# EAGLE board RAM_V2 (EAGLE 9.6.2)

Size 138.43 x 78.74 mm. Coordinates in mm from the lower left corner, seen from the top.
Outline: 133.35,0 138.43,5.08 138.43,73.66 133.35,78.74 5.08,78.74 0,73.66 0,5.08 5.08,0 133.35,0
Copper layers (1*16): Top 0.035mm / dielectric 1.5mm / Bottom 0.035mm
Design rules "default *": minimum track width 12mil, minimum drill 0.35mm, track to track 6mil, track to pad 6mil, pad to pad 6mil, via to via 6mil, smd to smd 6mil, copper to edge 40mil, drill to drill 6mil, minimum pad ring 10mil, minimum via ring 8mil, stop-mask expansion 4mil, vias tented up to drill 0mil, thermal gap 10mil

## Footprints (pad centres in the part's own frame; a part is rotated, then mirrored left to right if it is on the bottom)
LEDC1608X45N = smd 0.81 x 0.93: A 0.81,0; C -0.81,0
DIL14 = drill 0.813 long: 1 -7.62,-3.81; 2 -5.08,-3.81; 3 -2.54,-3.81; 4 0,-3.81; 5 2.54,-3.81; 6 5.08,-3.81; 7 7.62,-3.81; 8 7.62,3.81; 9 5.08,3.81; 10 2.54,3.81; 11 0,3.81; 12 -2.54,3.81; 13 -5.08,3.81; 14 -7.62,3.81
DIL20 = drill 0.813 long: 1 -11.43,-3.81; 2 -8.89,-3.81; 3 -6.35,-3.81; 4 -3.81,-3.81; 5 -1.27,-3.81; 6 1.27,-3.81; 7 3.81,-3.81; 8 6.35,-3.81; 9 8.89,-3.81; 10 11.43,-3.81; 11 11.43,3.81; 12 8.89,3.81; 13 6.35,3.81; 14 3.81,3.81; 15 1.27,3.81; 16 -1.27,3.81; 17 -3.81,3.81; 18 -6.35,3.81; 19 -8.89,3.81; 20 -11.43,3.81
R0805 = smd 1.3 x 1.5: 1 -0.95,0; 2 0.95,0
MA18-2 = drill 1.016 octagon: 1 -21.59,-1.27; 2 -21.59,1.27; 3 -19.05,-1.27; 4 -19.05,1.27; 5 -16.51,-1.27; 6 -16.51,1.27; 7 -13.97,-1.27; 8 -13.97,1.27; 9 -11.43,-1.27; 10 -11.43,1.27; 11 -8.89,-1.27; 12 -8.89,1.27; 13 -6.35,-1.27; 14 -6.35,1.27; 15 -3.81,-1.27; 16 -3.81,1.27; 17 -1.27,-1.27; 18 -1.27,1.27; 19 1.27,-1.27; 20 1.27,1.27; 21 3.81,-1.27; 22 3.81,1.27; 23 6.35,-1.27; 24 6.35,1.27; 25 8.89,-1.27; 26 8.89,1.27; 27 11.43,-1.27; 28 11.43,1.27; 29 13.97,-1.27; 30 13.97,1.27; 31 16.51,-1.27; 32 16.51,1.27; 33 19.05,-1.27; 34 19.05,1.27; 35 21.59,-1.27; 36 21.59,1.27
AS6C62256 = drill 0.813 long: !CE 7.62,-3.81; !OE 7.62,1.27; !WE 7.62,13.97; A0 -7.62,-6.35; A1 -7.62,-3.81; A2 -7.62,-1.27; A3 -7.62,1.27; A4 -7.62,3.81; A5 -7.62,6.35; A6 -7.62,8.89; A7 -7.62,11.43; A8 7.62,8.89; A9 7.62,6.35; A10 7.62,-1.27; A11 7.62,3.81; A12 -7.62,13.97; A13 7.62,11.43; A14 -7.62,16.51; GND -7.62,-16.51; I/O0 -7.62,-8.89; I/O1 -7.62,-11.43; I/O2 -7.62,-13.97; I/O3 7.62,-16.51; I/O4 7.62,-13.97; I/O5 7.62,-11.43; I/O6 7.62,-8.89; I/O7 7.62,-6.35; VCC 7.62,16.51

## Placement (x,y rotation side)
D1  LTST-C193KRKT-5A  [LEDC1608X45N]  -55.88,-12.7 0 top  (outside the outline)
D2  LTST-C193KRKT-5A  [LEDC1608X45N]  -55.88,-17.78 0 top  (outside the outline)
D3  LTST-C193KRKT-5A  [LEDC1608X45N]  -55.88,-22.86 0 top  (outside the outline)
D4  LTST-C193KRKT-5A  [LEDC1608X45N]  -55.88,-27.94 0 top  (outside the outline)
D5  LTST-C193KRKT-5A  [LEDC1608X45N]  -55.88,-33.02 0 top  (outside the outline)
D6  LTST-C193KRKT-5A  [LEDC1608X45N]  -55.88,-38.1 0 top  (outside the outline)
D7  LTST-C193KRKT-5A  [LEDC1608X45N]  -55.88,-43.18 0 top  (outside the outline)
D8  LTST-C193KRKT-5A  [LEDC1608X45N]  -55.88,-48.26 0 top  (outside the outline)
D9  LTST-C193KRKT-5A  [LEDC1608X45N]  -55.88,-53.34 0 top  (outside the outline)
D10  LTST-C193KRKT-5A  [LEDC1608X45N]  -55.88,-58.42 0 top  (outside the outline)
D11  LTST-C193KRKT-5A  [LEDC1608X45N]  -55.88,-63.5 0 top  (outside the outline)
D12  LTST-C193KRKT-5A  [LEDC1608X45N]  -55.88,-68.58 0 top  (outside the outline)
D13  LTST-C193KRKT-5A  [LEDC1608X45N]  -55.88,-73.66 0 top  (outside the outline)
D14  LTST-C193KRKT-5A  [LEDC1608X45N]  -55.88,-78.74 0 top  (outside the outline)
D15  LTST-C193KRKT-5A  [LEDC1608X45N]  -55.88,-83.82 0 top  (outside the outline)
D16  LTST-C193KRKT-5A  [LEDC1608X45N]  -55.88,-88.9 0 top  (outside the outline)
D17  LTST-C193KRKT-5A  [LEDC1608X45N]  -55.88,-93.98 0 top  (outside the outline)
D18  LTST-C193KRKT-5A  [LEDC1608X45N]  -55.88,-99.06 0 top  (outside the outline)
D19  LTST-C193KRKT-5A  [LEDC1608X45N]  -55.88,-104.14 0 top  (outside the outline)
D20  LTST-C193KRKT-5A  [LEDC1608X45N]  -55.88,-109.22 0 top  (outside the outline)
D21  LTST-C193KRKT-5A  [LEDC1608X45N]  -55.88,-114.3 0 top  (outside the outline)
D22  LTST-C193KRKT-5A  [LEDC1608X45N]  -55.88,-119.38 0 top  (outside the outline)
D23  LTST-C193KRKT-5A  [LEDC1608X45N]  -55.88,-124.46 0 top  (outside the outline)
D24  LTST-C193KRKT-5A  [LEDC1608X45N]  -55.88,-129.54 0 top  (outside the outline)
IC1  74HCT04N  [DIL14]  -46.99,-299.72 0 top  (outside the outline)
IC2  74HCT32N  [DIL14]  -46.99,-311.15 0 top  (outside the outline)
IC3  74HCT08N  [DIL14]  -46.99,-322.58 0 top  (outside the outline)
IC4  74HCT245N  [DIL20]  -43.18,-334.01 0 top  (outside the outline)
IC5  74HCT32N  [DIL14]  -46.99,-345.44 0 top  (outside the outline)
R1  [R0805]  -55.88,-135.89 0 top  (outside the outline)
R2  [R0805]  -55.88,-140.97 0 top  (outside the outline)
R3  [R0805]  -55.88,-146.05 0 top  (outside the outline)
R4  [R0805]  -55.88,-151.13 0 top  (outside the outline)
R5  [R0805]  -55.88,-156.21 0 top  (outside the outline)
R6  [R0805]  -55.88,-161.29 0 top  (outside the outline)
R7  [R0805]  -55.88,-166.37 0 top  (outside the outline)
R8  [R0805]  -55.88,-171.45 0 top  (outside the outline)
R9  [R0805]  -55.88,-176.53 0 top  (outside the outline)
R10  [R0805]  -55.88,-181.61 0 top  (outside the outline)
R11  [R0805]  -55.88,-186.69 0 top  (outside the outline)
R12  [R0805]  -55.88,-191.77 0 top  (outside the outline)
R13  [R0805]  -55.88,-196.85 0 top  (outside the outline)
R14  [R0805]  -55.88,-201.93 0 top  (outside the outline)
R15  [R0805]  -55.88,-207.01 0 top  (outside the outline)
R16  [R0805]  -55.88,-212.09 0 top  (outside the outline)
R17  [R0805]  -55.88,-217.17 0 top  (outside the outline)
R18  [R0805]  -55.88,-222.25 0 top  (outside the outline)
R19  [R0805]  -55.88,-227.33 0 top  (outside the outline)
R20  [R0805]  -55.88,-232.41 0 top  (outside the outline)
R21  [R0805]  -55.88,-237.49 0 top  (outside the outline)
R22  [R0805]  -55.88,-242.57 0 top  (outside the outline)
R23  [R0805]  -55.88,-247.65 0 top  (outside the outline)
R24  [R0805]  -55.88,-252.73 0 top  (outside the outline)
SV1  [MA18-2]  -34.29,-259.08 0 top  (outside the outline)
SV2  [MA18-2]  -34.29,-269.24 0 top  (outside the outline)
SV3  [MA18-2]  -34.29,-279.4 0 top  (outside the outline)
SV4  [MA18-2]  -34.29,-289.56 0 top  (outside the outline)
U$1  AS6C62256  [AS6C62256]  -16.51,8.89 0 top  (outside the outline)
U$2  AS6C62256  [AS6C62256]  -44.45,8.89 0 top  (outside the outline)

## Library data of the parts
D1-D24 = Dargon's_lib; MANUFACTURER: Lite-On; MAXIMUM_PACKAGE_HEIGHT: 0.45 mm; PARTREV: C; STANDARD: IPC 7351B
IC1-IC5 = 74xx-eu
R1-R24 = rcl; SPICEPREFIX: R
SV1-SV4 = con-lstb; OC_FARNELL: unknown; OC_NEWARK: unknown
U$1 U$2 = Dargon's_lib

## Nets
!ASSERT_MAIN: IC3.5
!CLK: IC2.1 IC2.13
!MW_E: IC3.2
!WE: IC3.1
ADDRESS_BUS_0: D1.A U$1.A0 U$2.A0
ADDRESS_BUS_1: D2.A U$1.A1 U$2.A1
ADDRESS_BUS_2: D3.A U$1.A2 U$2.A2
ADDRESS_BUS_3: D4.A U$1.A3 U$2.A3
ADDRESS_BUS_4: D5.A U$1.A4 U$2.A4
ADDRESS_BUS_5: D6.A U$1.A5 U$2.A5
ADDRESS_BUS_6: D7.A U$1.A6 U$2.A6
ADDRESS_BUS_7: D8.A U$1.A7 U$2.A7
ADDRESS_BUS_8: D9.A U$1.A8 U$2.A8
ADDRESS_BUS_9: D10.A U$1.A9 U$2.A9
ADDRESS_BUS_10: D11.A U$1.A10 U$2.A10
ADDRESS_BUS_11: D12.A U$1.A11 U$2.A11
ADDRESS_BUS_12: D13.A U$1.A12 U$2.A12
ADDRESS_BUS_13: D14.A U$1.A13 U$2.A13
ADDRESS_BUS_14: D15.A U$1.A14 U$2.A14
ADDRESS_BUS_15: D16.A IC1.1 IC1.3 IC1.9 IC2.4 IC5.2 U$1.!CE
AYETG: IC1.5 IC1.11 IC2.5 IC2.12 IC3.3 IC3.4
DATA_BUS_0: D17.A IC4.18 U$1.I/O0 U$2.I/O0
DATA_BUS_1: D18.A IC4.17 U$1.I/O1 U$2.I/O1
DATA_BUS_2: D19.A IC4.16 U$1.I/O2 U$2.I/O2
DATA_BUS_3: D20.A IC4.15 U$1.I/O3 U$2.I/O3
DATA_BUS_4: D21.A IC4.14 U$1.I/O4 U$2.I/O4
DATA_BUS_5: D22.A IC4.13 U$1.I/O5 U$2.I/O5
DATA_BUS_6: D23.A IC4.12 U$1.I/O6 U$2.I/O6
DATA_BUS_7: D24.A IC4.11 U$1.I/O7 U$2.I/O7
GND: IC1.7 IC2.7 IC3.7 IC4.10 IC5.7 R1.1 R2.1 R3.1 R4.1 R5.1 R6.1 R7.1 R8.1 R9.1 R10.1 R11.1 R12.1 R13.1 R14.1 R15.1 R16.1 R17.1 R18.1 R19.1 R20.1 R21.1 R22.1 R23.1 R24.1 U$1.GND U$2.GND
MAIN_BUS_0: IC4.2
MAIN_BUS_1: IC4.3
MAIN_BUS_2: IC4.4
MAIN_BUS_3: IC4.5
MAIN_BUS_4: IC4.6
MAIN_BUS_5: IC4.7
MAIN_BUS_6: IC4.8
MAIN_BUS_7: IC4.9
N$1: D1.C R1.2
N$2: D2.C R2.2
N$3: D3.C R3.2
N$4: D4.C R4.2
N$5: D5.C R5.2
N$6: D6.C R6.2
N$7: D7.C R7.2
N$8: D8.C R8.2
N$9: D9.C R9.2
N$10: D10.C R10.2
N$11: D11.C R11.2
N$12: D12.C R12.2
N$13: D13.C R13.2
N$14: D14.C R14.2
N$15: D15.C R15.2
N$16: D16.C R16.2
N$17: D17.C R17.2
N$18: D18.C R18.2
N$19: D20.C R20.2
N$20: D21.C R21.2
N$21: D22.C R22.2
N$22: D23.C R23.2
N$23: D24.C R24.2
N$24: IC2.3 U$1.!WE
N$25: IC5.3 U$1.!OE
N$26: IC2.2 IC2.6
N$27: IC2.8 U$2.!WE
N$28: IC5.6 U$2.!OE
N$29: IC1.2 U$2.!CE
N$30: D19.C R19.2
N$31: IC2.10 IC2.11
N$32: IC1.4 IC2.9
N$33: IC1.6 IC5.1 IC5.4
N$34: IC1.8 IC5.5
N$35: IC1.10 IC4.1
N$36: IC3.6 IC4.19
VCC: IC1.14 IC2.14 IC3.14 IC4.20 IC5.14 U$1.VCC U$2.VCC

## Tracks (layer width: path | path; a pad name or v marks a point on that pad's centre or on a via)
!CLK  (1 unrouted)
ADDRESS_BUS_0  (2 unrouted)
ADDRESS_BUS_1  (2 unrouted)
ADDRESS_BUS_2  (2 unrouted)
ADDRESS_BUS_3  (2 unrouted)
ADDRESS_BUS_4  (2 unrouted)
ADDRESS_BUS_5  (2 unrouted)
ADDRESS_BUS_6  (2 unrouted)
ADDRESS_BUS_7  (2 unrouted)
ADDRESS_BUS_8  (2 unrouted)
ADDRESS_BUS_9  (2 unrouted)
ADDRESS_BUS_10  (2 unrouted)
ADDRESS_BUS_11  (2 unrouted)
ADDRESS_BUS_12  (2 unrouted)
ADDRESS_BUS_13  (2 unrouted)
ADDRESS_BUS_14  (2 unrouted)
ADDRESS_BUS_15  (6 unrouted)
AYETG  (5 unrouted)
DATA_BUS_0  (3 unrouted)
DATA_BUS_1  (3 unrouted)
DATA_BUS_2  (3 unrouted)
DATA_BUS_3  (3 unrouted)
DATA_BUS_4  (3 unrouted)
DATA_BUS_5  (3 unrouted)
DATA_BUS_6  (3 unrouted)
DATA_BUS_7  (3 unrouted)
GND  (30 unrouted)
N$1  (1 unrouted)
N$2  (1 unrouted)
N$3  (1 unrouted)
N$4  (1 unrouted)
N$5  (1 unrouted)
N$6  (1 unrouted)
N$7  (1 unrouted)
N$8  (1 unrouted)
N$9  (1 unrouted)
N$10  (1 unrouted)
N$11  (1 unrouted)
N$12  (1 unrouted)
N$13  (1 unrouted)
N$14  (1 unrouted)
N$15  (1 unrouted)
N$16  (1 unrouted)
N$17  (1 unrouted)
N$18  (1 unrouted)
N$19  (1 unrouted)
N$20  (1 unrouted)
N$21  (1 unrouted)
N$22  (1 unrouted)
N$23  (1 unrouted)
N$24  (1 unrouted)
N$25  (1 unrouted)
N$26  (1 unrouted)
N$27  (1 unrouted)
N$28  (1 unrouted)
N$29  (1 unrouted)
N$30  (1 unrouted)
N$31  (1 unrouted)
N$32  (1 unrouted)
N$33  (2 unrouted)
N$34  (1 unrouted)
N$35  (1 unrouted)
N$36  (1 unrouted)
VCC  (6 unrouted)

## Text on the board
tPlace: Random Access Memory | V. 2.0 | by Dargonrol